# Altium PCB CMOY Pro.PcbDoc
Units mil, origin at the board's own origin, x right, y up, seen from the top; angles counter-clockwise.
Board outline 3750 x 2437.5 mil, 2 copper layers (Top Layer, Bottom Layer); 34 components, 23 nets, 100 pads, 10 vias.
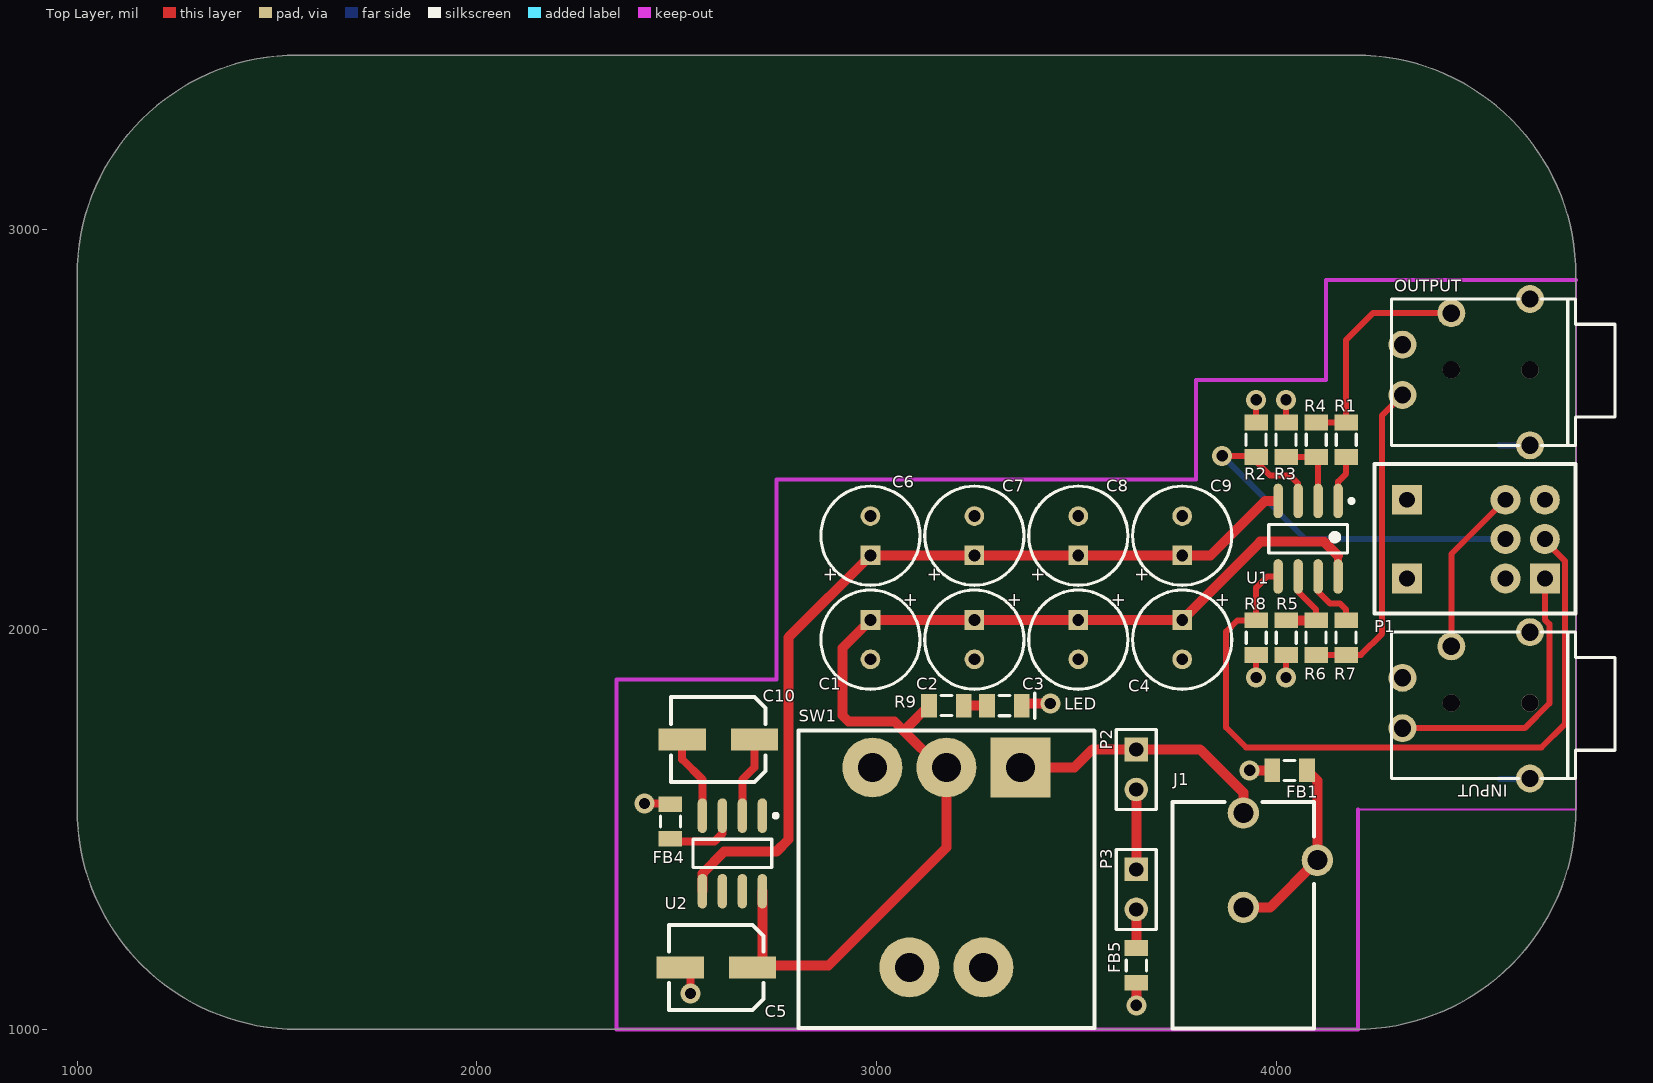
[diagram p0: Top Layer view]
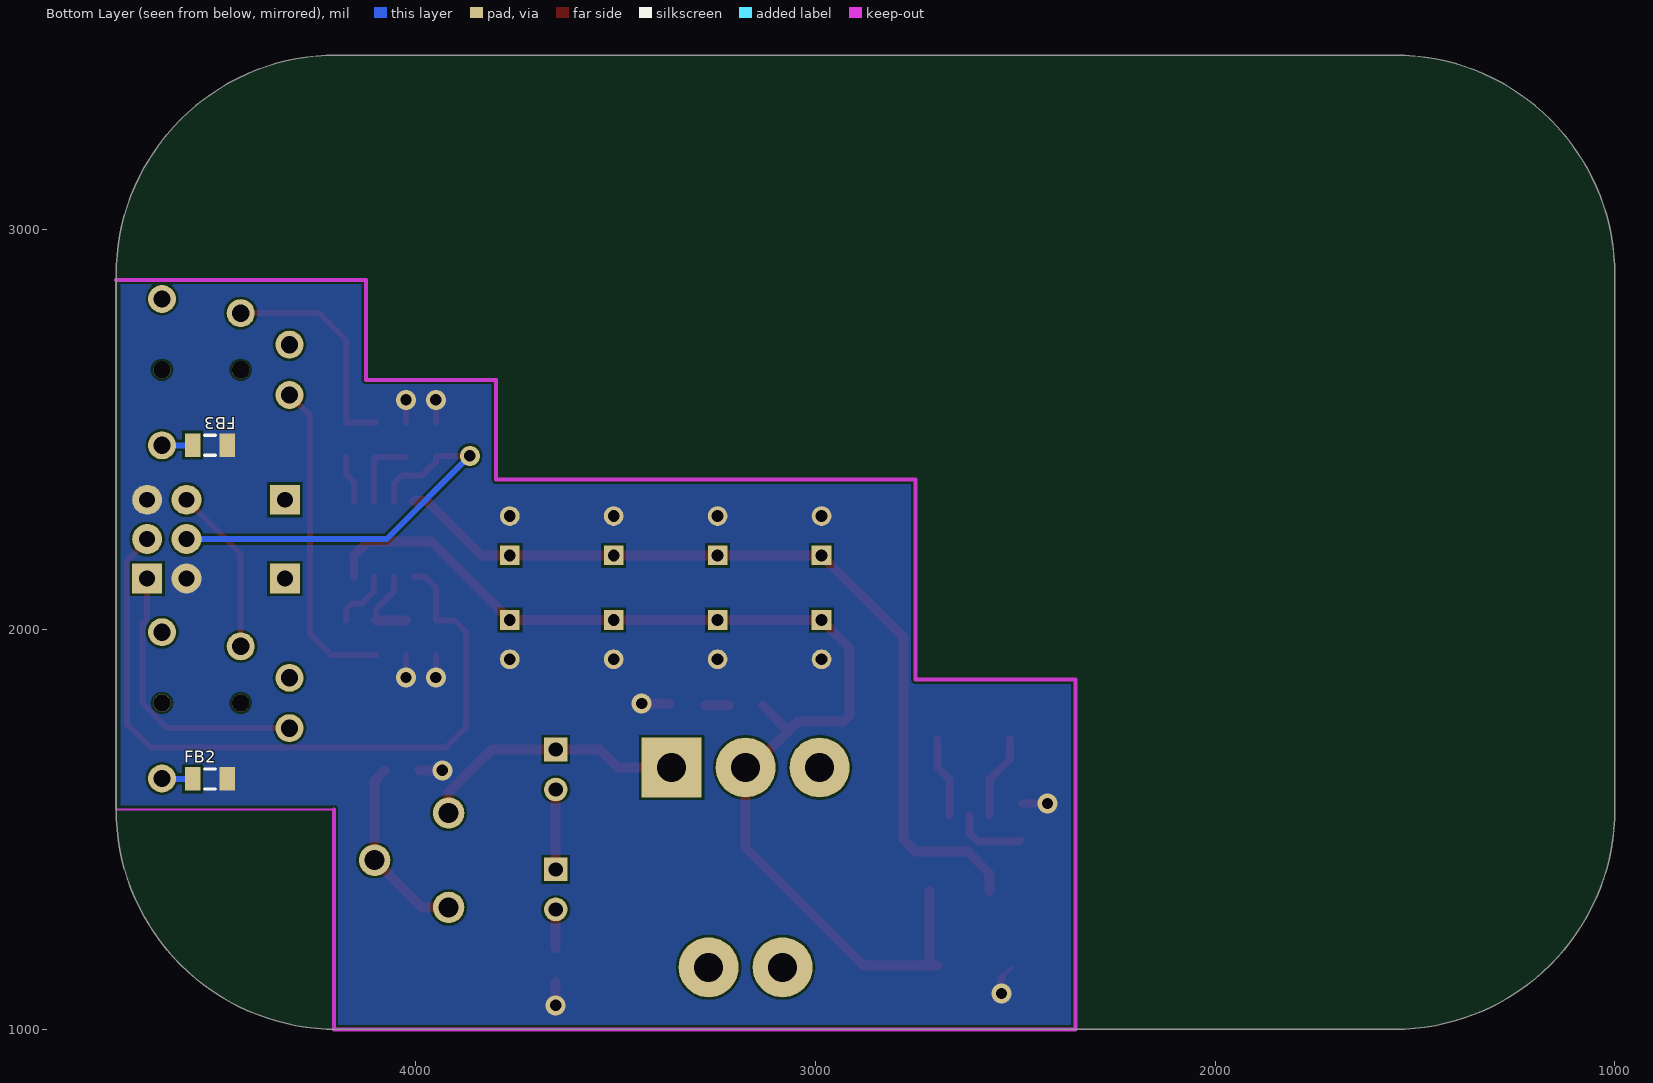
[diagram p1: Bottom Layer view, seen from below]

## Layer stack, top to bottom
Top Layer: signal copper 1.4
Dielectric: dielectric 12.6, FR-4, Dk 4.8
Bottom Layer: signal copper 1.4

## Board outline
1000,1551.18 1000,2886.32 cw(c1551.18,2886.32) 1551.18,3437.5 4198.82,3437.5 cw(c4198.82,2886.32) 4750,2886.32 4750,1551.18 cw(c4198.82,1551.18) 4198.82,1000 1551.18,1000 cw(c1551.18,1551.18)

## Design rules (kind name [scope] priority, off if disabled: settings)
Clearance [All] p1: gap=6
ComponentClearance [All] p1: gap=0 collisioncheckmode=3 verticalgap=10 showdistances=FALSE
FanoutControl Fanout_SOIC [(InComponent('U8') AND InComponent('U7'))] p3: bgadir=Out bgaviamode=Centered fanoutstyle=Staggered fanoutdirection=Alternating viagrid=1 // Fanout_SOIC (Default Rule)
FanoutControl Fanout_Small [All] p4: bgadir=Out bgaviamode=Centered fanoutstyle=Auto fanoutdirection=Alternating viagrid=1 // Fanout_Small (Default Rule)
HoleSize [All] p1: absolutevalues=TRUE maxlimit=120 minlimit=1 maxpercent=80.000 minpercent=20.000
MinimumSolderMaskSliver [All] p1 off: minsoldermaskwidth=10
PlaneConnect [All] p1: planeconnectstyle=Direct reliefexpansion=20 reliefentries=4 reliefconductorwidth=10 reliefairgap=10
PolygonConnect [All] p1: connectstyle=Direct reliefconductorwidth=45 reliefentries=4 polygonreliefangle="90 Angle" airgapwidth=10
RoutingVias [All] p1: holewidth=15 width=25 viastyle="Through Hole" minholewidth=15 minwidth=25 maxholewidth=28 maxwidth=50
SilkToSilkClearance [All] p1 off: silktosilkclearance=10
SilkToSolderMaskClearance SilkscreenOverComponentPads [IsPad] p1 off: minsilkscreentomaskgap=10 clearancetoexposedcopper=TRUE
SolderMaskExpansion [All] p1: expansion=4
Width [All] p1: maxlimit=30 minlimit=6 preferedwidth=6 minimp=50.000000 maximp=50.000000 favimp=50.000000
20 further rules are at their usual default settings.

## Components (designator, comment, footprint, x,y, rotation, side; value= is the part's Value field where it differs from the comment)
C1 "VS C" CAPPR2.5-6.3x5 2985,1975 r270 top
C2 "VS C" CAPPR2.5-6.3x5 3245,1975 r270 top
C3 "VS C" CAPPR2.5-6.3x5 3505,1975 r270 top
C4 "VS C" CAPPR2.5-6.3x5 3765,1975 r270 top
C5 "Cap Pol1" "Panasonic VS C" 2479.45,1040 r0 top
C6 "VS C" CAPPR2.5-6.3x5 2985,2235 r90 top
C7 "VS C" CAPPR2.5-6.3x5 3245,2235 r90 top
C8 "VS C" CAPPR2.5-6.3x5 3505,2235 r90 top
C9 "VS C" CAPPR2.5-6.3x5 3765,2235 r90 top
C10 "Cap Pol1" "Panasonic VS C" 2484.45,1610 r0 top
FB1 "Ferrite" "SM 0805 - gap trimmed" 4033.78,1648.07 r0 top
FB2 "Ferrite" "SM 0805 - gap trimmed" 4515,1626.5 r180 bottom
FB3 "Ferrite" "SM 0805 - gap trimmed" 4515,2461.5 r180 bottom
FB4 "Ferrite" "SM 0805 - gap trimmed" 2484.45,1520 r90 top
FB5 "Ferrite" "SM 0805 - gap trimmed" 3650,1160 r90 top
INPUT "CUI 43515TS" "CUI SJ-43515TS" 4635,1816.5 r180 top
J1 "Center-positive 2.1 mm power jack" PJ-102AH 3918.07,1541.22 r180 top
LED "LED1" "SM 0805 polarized" 3400,1766 r180 top
OUTPUT "CUI 43515TS" "CUI SJ-43515TS" 4635,2650 r180 top
P1 "RK0971221Z05" RK0971221Z05 4500,2226.5 r0 top
P2 "Bat2" HDR1X2 3650,1700 r270 top
P3 "Bat1" HDR1X2 3650,1400 r270 top
R1 "0805" "SM 0805 - gap trimmed" 4175,2475 r90 top
R2 "0805" "SM 0805 - gap trimmed" 3950,2475 r270 top
R3 "0805" "SM 0805 - gap trimmed" 4025,2475 r270 top
R4 "0805" "SM 0805 - gap trimmed" 4100,2475 r90 top
R5 "0805" "SM 0805 - gap trimmed" 4025,1980 r90 top
R6 "0805" "SM 0805 - gap trimmed" 4100,1980 r270 top
R7 "0805" "SM 0805 - gap trimmed" 4175,1980 r270 top
R8 "0805" "SM 0805 - gap trimmed" 3950,1980 r90 top
R9 "0805" "SM 0805 - gap trimmed" 3175,1810 r180 top
SW1 "100SP1T2B1M6RE" 100SP1T2B1M6RE 3360,1655 r270 top (schematic designator SW?)
U1 "LME49722MA" M08A_N 4080,2227.5 r270 top
U2 "LT1054CS8" LT-S8-8_N 2639.45,1440 r270 top

## Footprints (in the part's own frame and the unit in brackets; to place one, negate y for a bottom-side part, rotate by r counter-clockwise, add the part's x,y. Pads: shape width x height; smd on the part's side, far side on the other; paste and mask are expansions set on the pad)
100SP1T2B1M6RE [mil] "SPDT Right Angle PCB Mount Toggle Switch"
  rect 150x150 hole 73: 1(0,0)
  round 150 hole 73: 2(0,-185.04) 3(0,-370.08) 4(500,-92.52) 5(500,-277.56)
  silkscreen extent -93,-555 652,185
CAPPR2.5-6.3x5 [mm] "Capacitor, Electrolytic, Radial; Body 6.3 x 5 mm (Dia.xH typ); Pin Spacing 2.5 mm (typ)"
  rect 1.25x1.25 hole 0.75: 1(-1.25,0)
  round 1.25 hole 0.75: 2(1.25,0)
  silkscreen extent -3.15,-3.15 3.15,3.15
"CUI SJ-43515TS" [mm]
  round 1.778 hole 1.1: 1(8.1,1.6) 3(8.1,-1.6) 4(5,-3.6) 5(0,4.8) 6(0,-4.5)
  round 1.1 hole 1.1: ""(0,0) ""(5,0)
  silkscreen extent -5.4,-4.5 8.8,4.8
HDR1X2 [mm] "Connector; Header; 2 Position"
  rect 1.5x1.5 hole 0.9: 1(0,0)
  round 1.5 hole 0.9: 2(2.54,0)
  silkscreen extent -1.27,-1.27 3.81,1.27
LT-S8-8_N [mm] "SOIC, 8-Leads, Body 5x4mm, Pitch 1.27mm, IPC Medium Density"
  oval 2.2x0.6 smd: 1(-2.4,1.905) 2(-2.4,0.635) 3(-2.4,-0.635) 4(-2.4,-1.905) 5(2.4,-1.905) 6(2.4,-0.635) 7(2.4,0.635) 8(2.4,1.905)
  silkscreen extent -2.52,-2.5 0.9,2.88, body extent -2,-2.5 2,2.5, height 1.76
M08A_N [mm] "SOIC, 8-Leads, Body 4.9x3.9mm, Pitch 1.27mm, IPC Medium Density"
  oval 2.2x0.6 smd: 1(-2.4,1.905) 2(-2.4,0.635) 3(-2.4,-0.635) 4(-2.4,-1.905) 5(2.4,-1.905) 6(2.4,-0.635) 7(2.4,0.635) 8(2.4,1.905)
  silkscreen extent -2.52,-2.5 0.9,2.88, body extent -2,-2.5 2,2.5, height 1.75
"Panasonic VS C" [mm]
  rect 3x1.4 smd: 1(5.348,2.921) 2(0.748,2.921)
  silkscreen extent 0.05,0.22 6.05,5.62
PJ-102AH [mm] "Center positive 2.1 mm power jack"
  round 2 hole 1.27: 1(0,0) 2(0,6) 3(-4.7,3)
  silkscreen extent -4.5,-0.7 4.5,13.7, body extent -5.8,-0.7 4.5,13.7, height 11
RK0971221Z05 [mm] "Doubke Ganged 10k Pot"
  round 1.905 hole 1.016: 1(1.875,2.5) 2(1.875,0) 3(1.875,-2.5) 5(4.375,0) 6(4.375,2.5)
  rect 1.905x1.905 hole 1.016: 4(4.375,-2.5) 7(-4.375,2.5) 8(-4.375,-2.5)
  silkscreen extent -6.46,-4.74 6.32,4.76, body extent -6.46,-4.74 24.34,4.76, height 11.35
"SM 0805 - gap trimmed" [mm]
  rect 1x1.5 smd: 1(-1.1,0) 2(1.1,0)
  silkscreen extent -0.36,-0.64 0.35,0.63
"SM 0805 polarized" [mm]
  rect 1x1.5 smd: 1(0.93,-1.105) 2(3.13,-1.105)
  silkscreen extent 0.1,-1.9 2.38,-0.3

## Part data
C1 C2 C3 C4 C6 C7 C8 C9: library part "Cap Pol1", "Polarized Capacitor (Radial)"
C5 C10: "Polarized Capacitor (Radial)"
FB1 FB2 FB3 FB4 FB5: library part Inductor, "Inductor"
J1: library part PWR2.5, "Power jack"
LED: "Typical RED GaAs LED"
P1: "PCB Mount Dual Ganged 10K Pot"
P2 P3: library part "Header 2", "Header, 2-Pin"
R1 R2 R3 R4 R5 R6 R7 R8 R9: library part Res3, "Resistor"
SW1: "Right angle PCB Mount Toggle Switch"
U1: "Low Noise, High Performance, High Fidelity Dual Audio Operational Amplifier, 8-pin Narrow SOIC"
U2: "Switched-Capacitor Voltage Converter with Regulator, 3.5 to 15 V Vin, Adjustable Vout, 8-pin SOIC (S8-8), 0 to 100 degC"

## Via types
v1: diameter 50, hole 28, Top Layer to Bottom Layer, 10 vias

## Nets (pads, with @x,y where several pads share a name; then routed paths per layer and width w, separated by ;. In a path a pad name is that pad's centre, name@x,y a point inside that pad or via, vN(x,y) a via of type N, cw(c..) or ccw(c..) an arc to the next point about the centre after c; other vN are vias at no path point)
+18V: C1.1 C2.1 C3.1 C4.1 C5.1 R9.2 SW1.2 U1.8 U2.8 | length 2992.8
  Top Layer w10: C5.1 2695,1160 C5.1@2714.45,1179.45
  Top Layer w20: U1.8 4155,2185
  Top Layer w25: C5.1@2695,1160 2880,1160 3174.96,1454.96 SW1.2 3160,1655 3066.5,1748.5 ; C5.1@2714.45,1179.45 U2.8 ; R9.2 3070.19,1748.5 3066.5,1748.5 ; 3960,2219.21 C4.1 C3.1 C2.1 C1.1 2915,1954.21 2915,1785 2930,1770 3045,1770 3066.5,1748.5 ; 3960,2220 4120,2220 4155,2185
-18V: C6.1 C7.1 C8.1 C9.1 U1.4 U2.5 | length 2167.4
  Top Layer w25: U2.5 2564.45,1390 2618.9,1444.45 2749.45,1444.45 2780,1475 2780,1980.79 C6.1 C7.1 C8.1 C9.1 3835.79,2185.79 3971.99,2321.99 U1.4
GND: C1.2 C2.2 C3.2 C4.2 C5.2 C6.2 C7.2 C8.2 C9.2 FB1.1 FB2.2 FB3.2 FB4.2 FB5.1 LED.1 P1.3 P1.6 R2.1 R3.1 R5.1 R8.1 | length 553.7
  Top Layer w10: FB4.2@2482.76,1565 FB4.2 ; C5.2 C5.2@2534.45,1129.45 ; LED.1@3363.39,1813.5 LED.1@3364.88,1815
  Top Layer w15: v1(3950,1880) R8.1 ; R2.1 v1(3950,2575) ; v1(4025,1880) R5.1 ; R3.1 v1(4025,2575)
  Top Layer w20: v1(2419.45,1565) FB4.2@2482.76,1565 ; v1(2534.45,1090) C5.2@2534.45,1129.45
  Top Layer w25: LED.1@3364.88,1815 v1(3435,1815) ; v1(3650,1060) FB5.1 ; v1(3933.78,1648.07) FB1.1
LEFT_IN: INPUT.4 P1.1 | length 422.9
  Top Layer w15: INPUT.4 4438.15,2189.26 P1.1
LEFT_OUT: OUTPUT.4 R1.2 R4.2 | length 572.5
  Top Layer w15: R4.2 R1.2 4175,2725 4241.73,2791.73 OUTPUT.4
NetC10_1: C10.1 U2.2 | length 203.2
  Top Layer w20: U2.2 2664.45,1625 2695,1655.55 C10.1
NetC10_2: C10.2 U2.4 | length 211.5
  Top Layer w20: C10.2 2513.9,1675.55 2564.45,1625 U2.4
NetFB1_2: FB1.2 J1.2 J1.3 | length 469.6
  Top Layer w15: J1.3 J1.3
  Top Layer w25: J1.2 3985,1305 J1.3 ; FB1.2 4103.07,1622.09 J1.3
NetFB2_1: FB2.1 INPUT.5 | length 77.1
  Bottom Layer w15: FB2.1 4633.98,1626.5 INPUT.5
NetFB3_1: FB3.1 OUTPUT.5 | length 76.9
  Bottom Layer w15: FB3.1 4558.78,2461.02 OUTPUT.5
NetFB4_1: FB4.1 U2.3 | length 185.5
  Top Layer w15: FB4.1 FB4.1@2491.14,1470
  Top Layer w20: FB4.1@2491.14,1470 2594.45,1470 2614.45,1490 U2.3
NetFB5_2: FB5.2 P3.2 | length 96.7
  Top Layer w25: FB5.2 P3.2
NetJ1_1: J1.1 P2.1 SW1.1 | length 672.2
  Top Layer w25: SW1.1 3495,1655 3540,1700 P2.1 3810,1700 3918.07,1591.93 J1.1
NetLED_2: LED.2 R9.1 | length 58
  Top Layer w25: R9.1 LED.2@3276.28,1810
NetP1_2: P1.2 R2.2 U1.3 | length 1064
  Top Layer w15: v1(3865,2435) 3946.69,2435 R2.2 3950,2420 3985,2385 4035,2385 4055,2365 U1.3
  Bottom Layer w15: v1(3865,2435) 4073.5,2226.5 P1.2
NetP1_5: P1.5 R8.2 U1.5 | length 1851.6
  Top Layer w15: U1.5 3978.01,2133.01 3950,2105 R8.2 3903.31,2023.31 3875,1995 3875,1755 3925,1705 4663.5,1705 4723.24,1764.74 4723.24,2171.17 4672.24,2222.17 P1.5
NetP2_2: P2.2 P3.1 | length 200
  Top Layer w25: P3.1 P2.2
NetR1_1: R1.1 U1.1 | length 118
  Top Layer w15: U1.1 4155,2370 4175,2390 R1.1
NetR3_2: R3.2 R4.1 U1.2 | length 179.7
  Top Layer w15: R3.2 R4.1 ; U1.2 R4.1@4105,2426.69
NetR5_2: R5.2 R6.1 U1.6 | length 203.3
  Top Layer w15: U1.6 4055,2095 4100,2050 R6.1
  Top Layer w25: R5.2 R6.1
NetR7_1: R7.1 U1.7 | length 153.3
  Top Layer w15: U1.7 4105,2095 4135,2065 4160,2065 4175,2050 R7.1
RIGHT_IN: INPUT.1 P1.4 | length 710.4
  Top Layer w15: INPUT.1 4621.72,1753.51 4683.5,1815.29 4683.5,2013.75 4672.24,2025.01 P1.4
RIGHT_OUT: OUTPUT.1 R6.2 R7.2 | length 805.3
  Top Layer w15: R6.2 R7.2 4211.69,1936.69 4265,1990 4265,2535.91 OUTPUT.1
pads on no net: INPUT. INPUT.3 INPUT.6 OUTPUT. OUTPUT.3 OUTPUT.6 P1.7 P1.8 SW1.3 SW1.4 SW1.5 U2.1 U2.6 U2.7

## Polygon pours and split planes (outlines as drawn)
GND on Bottom Layer "Top Layer-No Net" (solid, remove dead copper, pour order 2): 4205,1000 4205,1550 4750,1550 4750,2875 4125,2875 4125,2625 3800,2625 3800,2375 2750,2375 2750,1875 2350,1875 2350,1000

## Keep-outs
Keep-Out Layer:
  lines w5: 4205,1550 4750,1550 4750,2875
  lines w10: 4205,1550 4205,1000 2350,1000 2350,1875 2750,1875 2750,2375 3800,2375 3800,2625 4125,2625 4125,2875 4750,2875

## Silkscreen, mask and mechanical layers (free items; w line width, h text height)
Mechanical 15:
  lines w5: 2360,985 4220,985 ; 1000,1551.18 ccw(c1551.18,1551.18) 1551.18,1000 4198.82,1000 ccw(c4198.82,1551.18) 4750,1551.18 4750,2886.32 ccw(c4198.82,2886.32) 4198.82,3437.5 1551.18,3437.5 ccw(c1551.18,2886.32) 1000,2886.32 1000,1551.18
  lines w10: 2360,985 2360,1875 2750,1875 2750,2375 3810,2375 3810,2625

## Text inside footprints (layer, text, board x,y; h text height)
C1: Top Overlay "+" at 3071,2093 h35 r270
C2: Top Overlay "+" at 3331,2093 h35 r270
C3: Top Overlay "+" at 3591,2093 h35 r270
C4: Top Overlay "+" at 3851,2093 h35 r270
C6: Top Overlay "+" at 2899,2117 h35 r90
C7: Top Overlay "+" at 3159,2117 h35 r90
C8: Top Overlay "+" at 3419,2117 h35 r90
C9: Top Overlay "+" at 3679,2117 h35 r90